# Altium PCB Board1_v1.PcbDoc
Units mm, origin at the board's own origin, x right, y up, seen from the top; angles counter-clockwise.
Board outline 100 x 70 mm, 2 copper layers (Top Layer, Bottom Layer); 24 components, 34 nets, 137 pads, 108 vias.
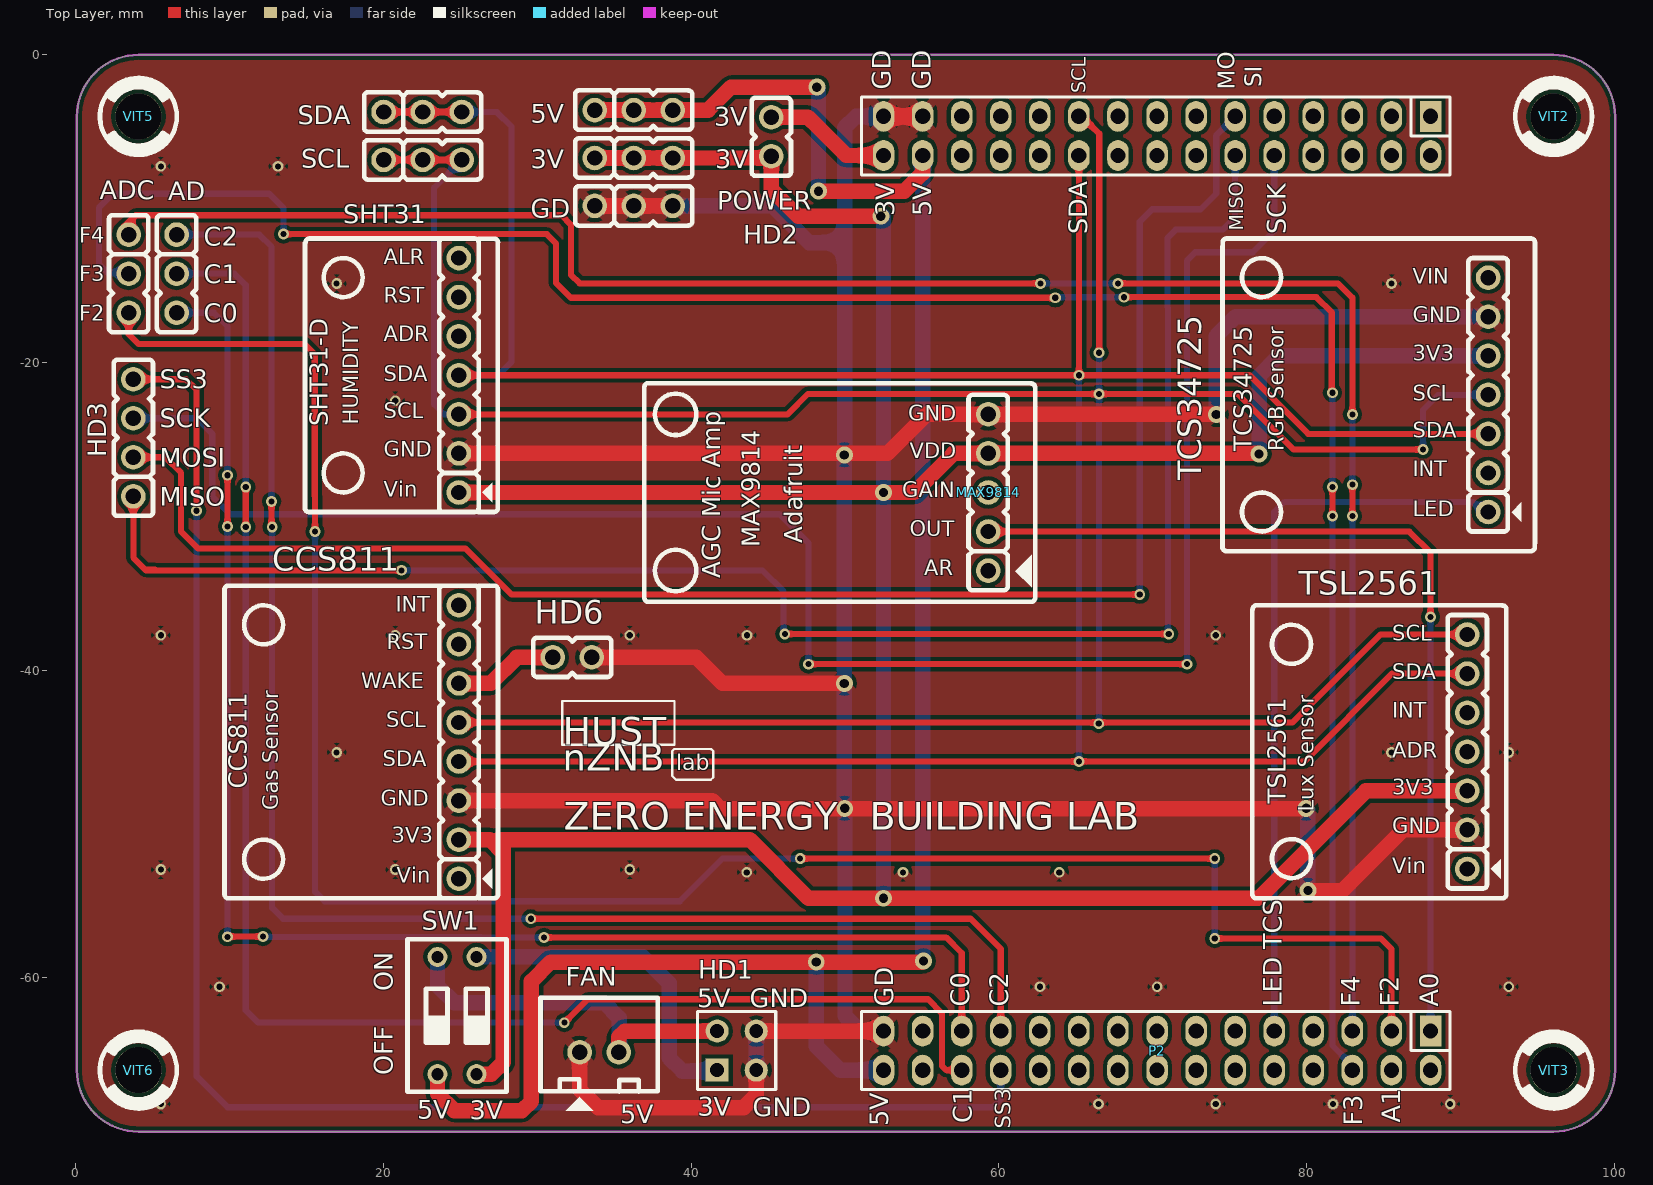
[diagram p0: Top Layer view]
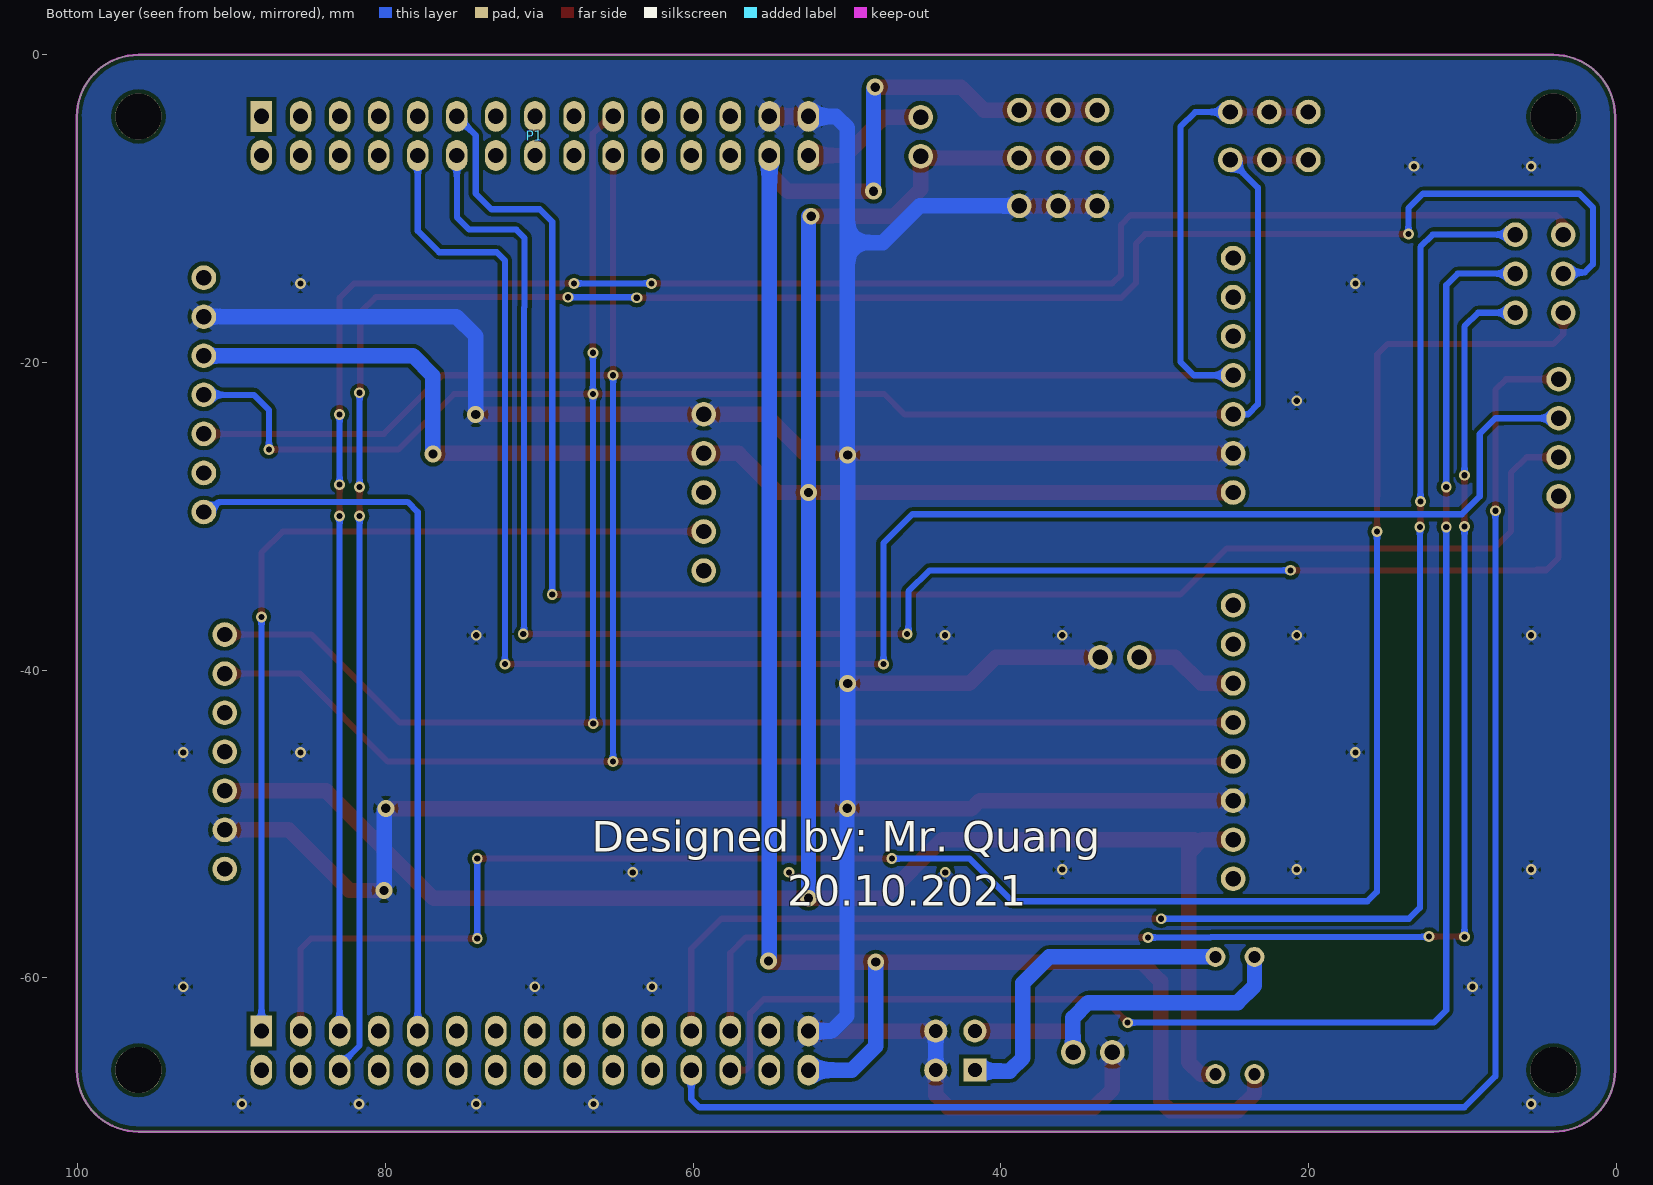
[diagram p1: Bottom Layer view, seen from below]

## Layer stack, top to bottom
Top Solder: solder mask 0.0102, Solder Resist, Dk 3.5
Top Layer: signal copper 0.0356
Dielectric 1: dielectric 0.32, FR-4, Dk 4.8
Bottom Layer: signal copper 0.0356
Bottom Solder: solder mask 0.0102, Solder Resist, Dk 3.5

## Board outline
0.064,-66 ccw(c4.064,-66) 4.064,-70 96.064,-70 ccw(c96.064,-66) 100.064,-66 100.064,-4 ccw(c96.064,-4) 96.064,0 4.064,0 ccw(c4.064,-4) 0.064,-4

## Design rules (kind name [scope] priority, off if disabled: settings)
Clearance "Stitching GND" [IsStitchingVia and InNet('GND') vs (IsVia and (Not IsStitchingVia)) Or IsPad] p1: gap=0.127 ignorepadtopadclearanceinfootprint=FALSE
Clearance [All] p2: gap=0.254 ignorepadtopadclearanceinfootprint=FALSE
PlaneConnect [All] p1: planeconnectstyle=Relief reliefexpansion=0.508 reliefentries=4 reliefconductorwidth=0.6 reliefairgap=0.4
PolygonConnect [All] p1: connectstyle=Relief reliefconductorwidth=0.6 reliefentries=4 polygonreliefangle="45 Angle" airgapwidth=0.254
RoutingVias RoutingVias_Power [InNetClass('Power_class')] p1: holewidth=0.6 width=1.1 viastyle="Through Hole" minholewidth=0.6 minwidth=1.1 maxholewidth=0.6 maxwidth=1.1
RoutingVias RoutingVias_Signal [All] p2: holewidth=0.4 width=0.7 viastyle="Through Hole" minholewidth=0.4 minwidth=0.7 maxholewidth=0.4 maxwidth=0.7
SolderMaskExpansion [All] p1: expansion=0.102 istentingtop=FALSE
UnRoutedNet [All] p1: checkbadconnections=TRUE
Width Width_Power [InNetClass('Power_class')] p1: maxlimit=2 minlimit=1 preferedwidth=1
Width Width_Signal [All] p2: maxlimit=0.4 minlimit=0.4 preferedwidth=0.4
28 further rules are at their usual default settings.

## Components (designator, comment, footprint, x,y, rotation, side; value= is the part's Value field where it differs from the comment)
3V "Header 3" Header_3 36.264,-6.702 r0 top (schematic designator HD?)
5V "Header 3" Header_3 36.264,-3.588 r0 top (schematic designator HD?)
AD "Header 3" Header_3 6.544,-14.223 r270 top
ADC "Header 3" Header_3 3.43,-14.223 r270 top
CCS811 "JP8 PIN" CCS811 19.693,-49.963 r0 top value=JP7
FAN "JP2" CON2 34.017,-64.841 r0 top value="Terminal Block 2-pin 5mm Screw"
GD "Header 3" Header_3 36.264,-9.816 r0 top (schematic designator HD?)
HD1 "Jumper 2x2" HDR2X2 41.688,-66.002 r0 top value="JP 2x2"
HD2 "PWR SEL" Header_2 45.206,-5.318 r90 top value="Header 2"
HD3 "SPI" Header_4 3.735,-24.892 r90 top value="Header 4"
HD6 "WAKE" Header_2 32.263,-39.164 r180 top value="Header 2"
MAX9814 "JP5" MAX9814 59.309,-33.528 r0 top
P1 "Header 15X2H" HED15X2H#1 88.064,-4 r180 bottom
P2 "Header 15X2H" HED15X2H#2 88.064,-63.46 r180 top
SCL "Header 3" Header_3 22.543,-6.828 r0 top
SDA "Header 3" Header_3 22.543,-3.714 r0 top
SHT31 "JP7 PIN" SHT31 24.9,-28.448 r0 top value=JP7
SW1 "SW - DIP2" DIP_Switch2 24.776,-62.452 r90 top
TCS34725 "JP7 PIN" TCS34725 74.537,-32.258 r0 top value=JP7
TSL2561 "JP7 PIN" TSL2561 90.456,-52.924 r0 top value=JP7
VIT2 "1" "Screw 3 small" 96.064,-4 r0 top
VIT3 "1" "Screw 3 small" 96.064,-66 r0 top
VIT5 "1" "Screw 3 small" 4.064,-4 r0 top
VIT6 "1" "Screw 3 small" 4.064,-66 r0 top

## Footprints (in the part's own frame and the unit in brackets; to place one, negate y for a bottom-side part, rotate by r counter-clockwise, add the part's x,y. Pads: shape width x height; smd on the part's side, far side on the other; paste and mask are expansions set on the pad)
CCS811 [mm]
  round 1.6 hole 1 mask+0.1: 1(5.207,-3.596) 2(5.207,-1.056) 3(5.207,1.484) 4(5.207,4.024) 5(5.207,6.564) 6(5.207,9.104) 7(5.207,11.644) 8(5.207,14.184)
  silkscreen extent -10.03,-4.87 7.75,15.45, body extent 3.94,-4.87 6.48,15.45, height 10.1
CON2 [mm] "CON2"
  round 1.6 hole 1 mask+0.1: 1(-1.27,0) 2(1.27,0)
  silkscreen extent -3.81,-3.8 3.81,3.56, body extent -3.75,-2.29 3.75,3.41, height 7
DIP_Switch2 [mm] "DIP Switch 4pin, 2.54mm"
  round 1.3 hole 0.8: 1(-3.81,1.27) 2(-3.81,-1.27) 3(3.81,-1.27) 4(3.81,1.27)
  silkscreen extent -4.95,-3.22 4.95,3.22
HDR2X2 [mm] "Connector; Header; 2x2 Position"
  rect 1.5x1.5 hole 0.9: 1(0,0)
  round 1.5 hole 0.9: 2(0,2.54) 3(2.54,0) 4(2.54,2.54)
  silkscreen extent -1.27,-1.27 3.81,3.81, body extent -1.27,-1.27 3.81,3.81, height 7
Header_2 [mm] "Connector DIP, 2Pin_2.54mm"
  round 1.6 hole 1 mask+0.1: 1(-1.27,0) 2(1.27,0)
  silkscreen extent -2.54,-1.28 2.54,1.28, body extent -2.54,-1.27 2.54,1.27, height 10.1
Header_3 [mm] "Connector DIP, 3Pin_2.54mm"
  round 1.6 hole 1 mask+0.1: 1(-2.54,0) 2(0,0) 3(2.54,0)
  silkscreen extent -3.81,-1.28 3.81,1.28, body extent -3.81,-1.27 3.81,1.27, height 10.1
Header_4 [mm] "Connector DIP, 4Pin_2.54mm"
  round 1.6 hole 1 mask+0.1: 1(-3.81,0) 2(-1.27,0) 3(1.27,0) 4(3.81,0)
  silkscreen extent -5.08,-1.28 5.08,1.28, body extent -5.08,-1.27 5.08,1.27, height 10.1
HED15X2H#1 [mm]
  rect 1.4x2 hole 1: 1(0,0)
  oval 1.4x2 hole 1: 2(0,-2.54) 3(2.54,0) 4(2.54,-2.54) 5(5.08,0) 6(5.08,-2.54) 7(7.62,0) 8(7.62,-2.54) 9(10.16,0) 10(10.16,-2.54) 11(12.7,0) 12(12.7,-2.54) 13(15.24,0) 14(15.24,-2.54) 15(17.78,0) 16(17.78,-2.54) 17(20.32,0) 18(20.32,-2.54) 19(22.86,0) 20(22.86,-2.54) 21(25.4,0) 22(25.4,-2.54) 23(27.94,0) 24(27.94,-2.54) 25(30.48,0) 26(30.48,-2.54) 27(33.02,0) 28(33.02,-2.54) 29(35.56,0) 30(35.56,-2.54)
  body extent -1.27,-3.81 36.83,1.27, height 10.1
HED15X2H#2 [mm]
  rect 1.4x2 hole 1: 1(0,0)
  oval 1.4x2 hole 1: 2(0,2.54) 3(2.54,0) 4(2.54,2.54) 5(5.08,0) 6(5.08,2.54) 7(7.62,0) 8(7.62,2.54) 9(10.16,0) 10(10.16,2.54) 11(12.7,0) 12(12.7,2.54) 13(15.24,0) 14(15.24,2.54) 15(17.78,0) 16(17.78,2.54) 17(20.32,0) 18(20.32,2.54) 19(22.86,0) 20(22.86,2.54) 21(25.4,0) 22(25.4,2.54) 23(27.94,0) 24(27.94,2.54) 25(30.48,0) 26(30.48,2.54) 27(33.02,0) 28(33.02,2.54) 29(35.56,0) 30(35.56,2.54)
  silkscreen extent -1.27,-1.27 37,3.81, body extent -1.27,-1.27 36.83,3.81, height 10.1
MAX9814 [mm] "JP5"
  round 1.6 hole 1 mask+0.1: 1(0,0) 2(0,2.54) 3(0,5.08) 4(0,7.62) 5(0,10.16)
  silkscreen extent -22.35,-2.03 3.05,12.19, body extent -1.27,-1.27 1.27,11.43, height 10.1
"Screw 3 small" [mm] "Hole 3mm, outline 5mm"
  round 3 hole 3 mask+0.1: 1(0,0)
  silkscreen extent -2.5,-2.5 2.5,2.5, body extent -2.5,-2.5 2.5,2.5, height 1.73
SHT31 [mm] "JP7"
  round 1.6 hole 1 mask+0.1: 1(0,0) 2(0,2.54) 3(0,5.08) 4(0,7.62) 5(0,10.16) 6(0,12.7) 7(0,15.24)
  silkscreen extent -10.01,-1.27 2.54,16.51, body extent -1.27,-1.27 1.27,16.51, height 10.1
TCS34725 [mm] "JP8"
  round 1.6 hole 1 mask+0.1: 1(17.272,2.54) 2(17.272,5.08) 3(17.272,7.62) 4(17.272,10.16) 5(17.272,12.7) 6(17.272,15.24) 7(17.272,17.78)
  silkscreen extent 0,0 20.32,20.32, body extent 16,1.27 18.54,19.05, height 10.1
TSL2561 [mm]
  round 1.6 hole 1 mask+0.1: 1(0,0) 2(0,2.54) 3(0,5.08) 4(0,7.62) 5(0,10.16) 6(0,12.7) 7(0,15.24)
  silkscreen extent -13.97,-1.91 2.54,17.14, body extent -1.27,-1.27 1.27,16.51, height 10.1

## Part data
3V 5V AD ADC GD SCL SDA: library part Header3
CCS811: library part JP8
FAN: library part "Terminal 2", "Terminal 2pin 5mm", Color=Blue, Current - IEC=-, Manufacturer="On Shore Technology Inc.", Manufacturer Part Number=OSTTH020160, Material Flammability Rating="UL94 V-0", Operating Temperature="-40°C ~ 115°C", Supplier Part Number 1=ED2655-ND, Voltage - UL=300V, BuyLink=http://www.tme.vn/Product.aspx?id=857#page=pro_info, Category="Connectors, Interconnects", ComponentLink1Description=http://www.on-shore.com/wp-content/uploads/2015/09/ostthxx0160.pdf, ComponentLink1URL=http://www.on-shore.com/wp-content/uploads/2015/09/ostthxx0160.pdf, Contact Material=Brass, Contact Mating Finish=Nickel, Contact Tail Length=-, Cost (VN)=1500, Current - UL=-, Features="Interlocking (Side)", Header Orientation=-, Housing Material=Brass, Ingress Protection=-, Insulation Height=-, Mounting Type=Screw, Number of Levels=2, Number of Positions=2, Packaging=Bulk, Part Status=Active, Pitch="0.197\" (5.00mm)", Plug Wire Entry=-, Positions Per Level=2, Pricing 1="1=0.58, 10=0.546, 50=0.4368, 100=0.4186, 250=0.3822, 500=0.364, 1000=0.3003, 2500=0.273, 5000=0.2639 (USD)", RoHS="RoHS Compliant", Screw Size=-, Stock 1=43547, Supplier 1=Digi-Key, Termination Style=Screw, Torque - Screw="0.4 Nm (3.5 Lb-In)", Type="Plug for Unshrouded Header", Voltage - IEC=-, Wire Gauge or Range - AWG="14-22 AWG", Wire Gauge or Range - mm²=0.34-1.5mm², Wire Strip Length=5-6mm
HD1: library part JP2x2
HD2 HD6: library part Header2, "Header 2"
HD3: library part Header4, "Header 4"
P1 P2: "Header, 15-Pin, Dual row, Right Angle", LatestRevisionDate=17-Jul-2002, LatestRevisionNote="Re-released for DXP Platform.", Publisher="Altium Limited"
SHT31 TCS34725 TSL2561: library part JP7
SW1: library part SWDIP-2, "DIP Switch, 2 Position, SPST"
VIT2 VIT3 VIT5 VIT6: library part VIT, "Oc Vit"

## Via types
v1: diameter 0.7, hole 0.4, Top Layer to Bottom Layer, 94 vias
v2: diameter 1.1, hole 0.6, Top Layer to Bottom Layer, 14 vias

## Nets (pads, with @x,y where several pads share a name; then routed paths per layer and width w, separated by ;. In a path a pad name is that pad's centre, name@x,y a point inside that pad or via, vN(x,y) a via of type N, cw(c..) or ccw(c..) an arc to the next point about the centre after c; other vN are vias at no path point)
3.3V: 3V.1 3V.2 3V.3 CCS811.2 HD2.1 MAX9814.4 SHT31.1 SW1.2 TCS34725.5 TSL2561.3 | length 226.9
  Top Layer w1: CCS811.2 26.911,-51.019 27.782,-51.89 ; SHT31.1 v2(52.504,-28.448) 54.502,-28.448 57.042,-25.908 MAX9814.4 76.884,-25.908 v2(76.921,-25.946) ; SW1.2 27.01,-66.262 27.782,-65.49 27.782,-51.89 ; 3V.1@33.641,-6.702 36.181,-6.702 38.721,-6.702 45.092,-6.702 HD2.1 45.206,-8.737 46.957,-10.489 v2(52.329,-10.489) ; TSL2561.3 83.855,-47.844 76.87,-54.829 v2(52.504,-54.829) 47.627,-54.829 43.817,-51.019 27.44,-51.019 27.782,-51.361 27.782,-51.89
  Bottom Layer w1: v2(52.504,-54.829) v2(52.504,-28.448) v2@52.504,-10.489 ; v2(76.921,-25.946) 76.921,-20.864 78.227,-19.558 TCS34725.5
5V: 5V.1 5V.2 5V.3 P1.28 P2.30 SW1.1 | length 135.3
  Top Layer w1: SW1.1 23.506,-67.539 24.605,-68.638 29.004,-68.638 29.612,-68.03 29.612,-60.228 30.865,-58.975 v2(48.131,-58.975) 55.025,-58.975 v2(55.099,-58.902) ; 5V.1@33.516,-3.588 5V.1 5V.2 5V.3 41.101,-3.588 42.591,-2.098 v2(48.17,-2.098) ; v2(48.277,-8.86) 53.87,-8.86 55.044,-7.686 P1.28
  Bottom Layer w1: v2(48.131,-58.975) 48.121,-58.985 48.121,-64.441 49.68,-66 P2.30 ; v2(48.17,-2.098) 48.277,-2.206 v2(48.277,-8.86) ; v2@55.044,-58.902 P1.28
\W\A\K\E\: CCS811.6 HD6.2 | length 6.8
  Top Layer w1: CCS811.6 26.967,-40.859 28.662,-39.164 HD6.2
ADC0: MAX9814.2 P2.1 | length 60.4
  Top Layer w0.4: MAX9814.2 86.692,-30.988 88.064,-32.36 v1(88.064,-36.54)
  Bottom Layer w0.4: P2.1 v1(88.064,-36.54)
ADDR1: SHT31.5
Addr2: TSL2561.4
ALERT: SHT31.7
AR: MAX9814.1
GAIN: MAX9814.3
GND: CCS811.3 FAN.1 GD.1 GD.2 GD.3 HD1.3 HD1.4 HD6.1 MAX9814.5 P1.27 P1.29 P2.29 SHT31.2 TCS34725.6 TSL2561.2 | length 273.9
  Top Layer w1: CCS811.3 41.374,-48.479 41.905,-49.01 79.948,-49.01 v2(79.978,-48.98) ; SHT31.2 52.758,-25.908 55.298,-23.368 MAX9814.5 74.131,-23.368 v2(74.139,-23.376) ; FAN.1 32.747,-67.246 33.942,-68.442 43.411,-68.442 44.228,-67.624 HD1.3 ; HD6.1 40.34,-39.164 42.035,-40.859 v2(49.957,-40.859) ; GD.1 GD.2 GD.3 ; HD1.4 P2.29 P2.29 ; P1.29 P1.27 ; v2(80.091,-54.321) 82.353,-54.321 86.29,-50.384 TSL2561.2
  Bottom Layer w1: GD.3 45.274,-9.816 47.659,-12.201 49.982,-12.201 ; HD1.3 HD1.4 ; P2.29 50.985,-63.46 49.996,-62.472 49.996,-48.995 v2(49.982,-48.98) 49.957,-48.98 v2(49.957,-40.859) v2(49.957,-26.004) 49.982,-25.979 49.982,-12.201 ; P1.29 50.717,-4 49.982,-4.734 49.982,-12.201 ; v2(74.139,-23.376) 74.139,-19.513 74.131,-19.504 74.131,-18.288 75.401,-17.018 TCS34725.6 ; v2(79.978,-48.98) 80.091,-49.093 v2(80.091,-54.321)
  other v1: 5.521,-68.205 5.521,-68.205 66.481,-68.205 66.481,-68.205 74.101,-68.205 74.101,-68.205 81.721,-68.205 81.721,-68.205 89.341,-68.205 89.341,-68.205 9.331,-60.585 9.331,-60.585 62.671,-60.585 62.671,-60.585 70.291,-60.585 70.291,-60.585 93.151,-60.585 93.151,-60.585 43.609,-53.144 53.769,-53.144 63.929,-53.144 5.521,-52.965 5.521,-52.965 20.761,-52.965 20.761,-52.965 36.001,-52.965 36.001,-52.965 16.951,-45.345 16.951,-45.345 85.531,-45.345 85.531,-45.345 93.151,-45.345 93.151,-45.345 5.521,-37.725 5.521,-37.725 20.761,-37.725 20.761,-37.725 36.001,-37.725 36.001,-37.725 43.621,-37.725 43.621,-37.725 74.101,-37.725 74.101,-37.725 20.761,-22.485 20.761,-22.485 16.951,-14.865 16.951,-14.865 85.531,-14.865 85.531,-14.865 5.521,-7.245 5.521,-7.245 13.141,-7.245 13.141,-7.245
Int2: TSL2561.5
INT3: CCS811.8
INT-TCS: TCS34725.2
LED-TCS: P2.9 TCS34725.1 | length 48.2
  Bottom Layer w0.4: P2.9 77.904,-29.718 78.563,-29.059 90.825,-29.059 91.484,-29.718 TCS34725.1
MISO: HD3.1 P1.12 | length 110.3
  Top Layer w0.4: HD3.1 3.735,-32.679 4.521,-33.465 5.142,-33.465 5.188,-33.51 ; 4.548,-33.492 4.566,-33.51 5.188,-33.51 ; v1(21.164,-33.51) 5.188,-33.51 ; v1(46.088,-37.645) v1(71.044,-37.645)
  Bottom Layer w0.4: v1(21.164,-33.51) 44.633,-33.51 46.004,-34.881 46.004,-37.561 v1(46.088,-37.645) ; v1(71.044,-37.645) 70.988,-37.589 70.988,-16.412 70.957,-16.38 70.957,-11.904 71.502,-11.359 74.56,-11.359 75.364,-10.555 P1.12
MOSI: HD3.2 P1.11 | length 106.8
  Top Layer w0.4: HD3.2 5.825,-26.162 6.841,-27.178 6.841,-30.99 7.93,-32.08 25.32,-32.08 28.32,-35.081 v1(69.164,-35.081)
  Bottom Layer w0.4: v1(69.164,-35.081) 69.164,-10.846 69.977,-10.033 73.112,-10.033 74.131,-9.014 74.131,-5.232 P1.11
NetFAN_2: FAN.2 HD1.2 SW1.4 | length 24.3
  Top Layer w1: FAN.2 35.287,-63.859 35.684,-63.462 HD1.2
  Bottom Layer w1: SW1.4 23.506,-60.517 24.605,-61.615 34.325,-61.615 35.312,-62.602 35.312,-64.815 FAN.2
NetHD1_1: HD1.1 SW1.3 | length 21.6
  Bottom Layer w1: SW1.3 36.868,-58.642 38.561,-60.335 38.561,-65.204 39.424,-66.067 41.623,-66.067 HD1.1
NetHD2_2: HD2.2 P1.30 | length 8.8
  Top Layer w1: HD2.2 47.582,-4.048 ; 47.898,-4.365 47.582,-4.048 ; P1.30 50.081,-6.54 47.59,-4.048 47.582,-4.048
PC0: AD.3 P2.25 | length 96.6
  Top Layer w0.4: v1(9.856,-30.653) v1(9.856,-27.332) ; v1(9.856,-57.336) 9.874,-57.319 v1(12.16,-57.319) ; v1(30.434,-57.375) 56.573,-57.375 57.584,-58.386 P2.25
  Bottom Layer w0.4: AD.3 8.972,-16.763 9.856,-17.647 v1(9.856,-27.332) ; v1(9.856,-57.336) v1(9.856,-30.653) ; v1(12.16,-57.319) 12.177,-57.336 26.331,-57.336 26.37,-57.375 v1(30.434,-57.375)
PC1: AD.2 P2.26 | length 103.4
  Top Layer w0.4: v1(11.042,-30.691) v1(11.042,-28.098) ; v1(31.753,-62.916) 33.279,-61.39 55.399,-61.39 56.297,-62.287 56.297,-65.725 56.573,-66.002 P2.26 P2.26
  Bottom Layer w0.4: AD.2 10.3,-14.223 11.042,-14.965 v1(11.042,-28.098) ; v1(11.042,-30.691) 11.042,-62.108 11.85,-62.916 v1(31.753,-62.916)
PC2: AD.1 P2.23 | length 103.3
  Top Layer w0.4: v1(12.72,-29.031) 12.72,-30.653 v1(12.758,-30.691) ; v1(29.577,-56.159) 58.165,-56.159 60.124,-58.118 P2.23
  Bottom Layer w0.4: AD.1 11.923,-11.683 12.72,-12.479 v1(12.72,-29.031) ; v1(12.758,-30.691) 12.758,-55.444 13.472,-56.159 v1(29.577,-56.159)
PF2: ADC.3 P2.3 | length 131.2
  Top Layer w0.4: ADC.3 3.438,-16.771 3.438,-18.163 4.064,-18.789 14.849,-18.789 15.525,-19.464 15.525,-28.681 15.545,-28.701 v1(15.545,-30.988) ; v1(47.083,-52.251) v1(74.037,-52.251) ; v1(74.033,-57.447) 84.854,-57.447 85.524,-58.118 P2.3
  Bottom Layer w0.4: v1(15.545,-30.988) 15.545,-54.402 16.166,-55.023 39.262,-55.023 42.035,-52.251 v1(47.083,-52.251) ; v1(74.033,-57.447) 74.037,-57.444 v1(74.037,-52.251)
PF3: ADC.2 P2.6 | length 142
  Top Layer w0.4: v1(13.501,-11.652) 30.013,-11.652 30.016,-11.655 30.605,-11.655 31.208,-12.258 31.208,-14.822 32.18,-15.793 v1(63.65,-15.793) v1(63.688,-15.793) ; v1(68.13,-15.755) 68.137,-15.748 80.65,-15.748 81.639,-16.736 81.639,-21.92 v1(81.684,-21.965) ; v1(81.684,-29.984) v1(81.684,-28.098)
  Bottom Layer w0.4: ADC.2 3.35,-14.143 2.03,-14.143 1.512,-13.625 1.512,-9.92 2.405,-9.027 12.554,-9.027 13.501,-9.975 v1(13.501,-11.652) ; v1(63.688,-15.793) v1(63.65,-15.793) 63.688,-15.755 v1(68.13,-15.755) ; v1(81.684,-29.984) 81.684,-64.4 82.984,-65.7 P2.6 ; v1(81.684,-28.098) v1(81.684,-21.965)
PF4: ADC.1 P2.5 | length 132.3
  Top Layer w0.4: ADC.1 3.43,-10.893 3.894,-10.429 31.571,-10.429 32.18,-11.038 32.18,-14.289 32.747,-14.856 v1(62.713,-14.856) ; v1(67.744,-14.856) 82.047,-14.856 82.984,-15.793 v1(82.984,-23.376) ; v1(82.984,-29.984) v1(82.984,-27.938)
  Bottom Layer w0.4: v1(62.713,-14.856) v1(67.744,-14.856) ; P2.5 v1(82.984,-29.984) ; v1(82.984,-27.938) v1(82.984,-23.376)
R\E\S\E\T\: CCS811.7
RST: SHT31.6
SCK: HD3.3 P1.10 | length 119.7
  Top Layer w0.4: v1(47.627,-39.608) v1(72.241,-39.608)
  Bottom Layer w0.4: HD3.3 7.297,-23.622 7.846,-23.622 8.867,-24.643 8.867,-28.702 10.028,-29.863 45.747,-29.863 47.627,-31.743 v1(47.627,-39.608) ; v1(72.241,-39.608) 72.241,-13.359 72.767,-12.833 76.516,-12.833 77.904,-11.445 P1.10
SCL: CCS811.5 P1.19 SCL.1 SCL.2 SCL.3 SHT31.3 TCS34725.4 TSL2561.7 | length 203.6
  Top Layer w0.4: SCL.1 SCL.2 SCL.3 ; CCS811.5 79.095,-43.399 84.81,-37.684 TSL2561.7 ; SHT31.3 46.267,-23.368 47.59,-22.046 v1(66.52,-22.046) 75.539,-22.046 79.146,-25.652 v1(87.581,-25.652) ; P1.19 65.409,-4 66.529,-5.12 66.529,-19.354 v1(66.52,-19.363)
  Bottom Layer w0.4: SHT31.3 23.921,-23.368 23.28,-22.728 23.28,-8.631 SCL.3 ; v1(66.493,-43.477) 66.52,-43.45 v1(66.52,-22.046) v1(66.52,-19.363) ; v1(87.581,-25.652) 87.581,-23.076 88.557,-22.1 91.807,-22.1 TCS34725.4
SDA: CCS811.4 P1.20 SDA.1 SDA.2 SDA.3 SHT31.4 TCS34725.3 TSL2561.6 | length 203.5
  Top Layer w0.4: SDA.1@20.095,-3.714 22.635,-3.714 SDA.3@25.175,-3.714 ; CCS811.4 v1(65.204,-45.939) 79.844,-45.939 85.558,-40.224 TSL2561.6 ; SHT31.4 v1(65.204,-20.828) ; P1.20 v1(65.204,-20.828) ; TCS34725.3 80.106,-24.638 76.296,-20.828 v1(65.204,-20.828)
  Bottom Layer w0.4: SHT31.4 27.444,-20.828 28.32,-19.952 28.32,-4.673 27.361,-3.714 SDA.3@25.175,-3.714 ; v1(65.204,-45.939) v1(65.204,-20.828)
SS3: HD3.4 P2.24 | length 104.2
  Top Layer w0.4: HD3.4 7.152,-21.082 7.846,-21.776 v1(7.846,-29.637)
  Bottom Layer w0.4: v1(7.846,-29.637) 7.846,-66.403 9.856,-68.413 59.599,-68.413 60.124,-67.888 P2.24
VIN: TCS34725.7
Vin2: TSL2561.1
Vin3: CCS811.1
pads on no net: P1.1 P1.2 P1.3 P1.4 P1.5 P1.6 P1.7 P1.8 P1.9 P1.13 P1.14 P1.15 P1.16 P1.17 P1.18 P1.21 P1.22 P1.23 P1.24 P1.25 P1.26 P2.2 P2.4 P2.7 P2.8 P2.10 P2.11 P2.12 P2.13 P2.14 P2.15 P2.16 P2.17 P2.18 P2.19 P2.20 P2.21 P2.22 P2.27 P2.28 VIT2.1 VIT3.1 VIT5.1 VIT6.1

## Polygon pours and split planes (outlines as drawn)
GND on Bottom Layer "Top Poly" (solid, remove dead copper, pour order 40): 1.304,-1.153 1.636,-0.821 2.642,-0.262 97.795,-0.262 100.064,-2.531 100.064,-67.624 97.688,-70 2.423,-70 0.064,-67.641 0.064,-2.422 1.33,-1.156
GND on Top Layer "Top Poly" (solid, remove dead copper, pour order 38): 1.371,0 97.898,0 100.064,-2.166 100.064,-67.624 97.688,-70 2.298,-70 0.064,-67.766 0.064,-3.469

## Keep-outs
Keep-Out Layer:
  the board outline again, w0.15

## Silkscreen, mask and mechanical layers (free items; w line width, h text height)
Top Overlay:
  lines w0.15: 31.61,-44.842 31.61,-42.002 38.917,-42.002 38.917,-44.842 31.61,-44.842 ; 38.76,-46.87 39.016,-47.126 41.27,-47.126 41.441,-46.955 41.441,-45.271 41.296,-45.125 38.905,-45.125 38.76,-45.271 38.76,-46.87
  text "SI" at 77.077,-2.098 h1.1 r90
  text "GD" at 52.964,-2.263 h1.2 r90
  text "GD" at 55.576,-2.263 h1.2 r90
  text "MO" at 75.33,-2.263 h1.1 r90
  text "SCL" at 65.661,-2.488 h0.9 r90
  text "3V" at 41.512,-4.591 h1.2
  text "3V" at 41.563,-7.355 h1.2
  text "POWER" at 41.688,-10.07 h1.2
  text "3V" at 53.197,-10.476 h1.2 r90
  text "5V" at 55.601,-10.476 h1.2 r90
  text "MISO" at 75.902,-11.446 h0.9 r90
  text "SDA" at 65.761,-11.676 h1.2 r90
  text "SCK" at 78.661,-11.676 h1.2 r90
  text "F4" at 0.23,-12.218 h1
  text "C2" at 8.31,-12.408 h1.2
  text "F3" at 0.23,-14.732 h1
  text "C1" at 8.31,-14.855 h1.2
  text "F2" at 0.23,-17.272 h1
  text "C0" at 8.31,-17.395 h1.2
  text "SS3" at 5.463,-21.68 h1.2
  text "SCK" at 5.463,-24.22 h1.2
  text "MOSI" at 5.463,-26.76 h1.2
  text "MISO" at 5.463,-29.3 h1.2
  text "HUST" at 31.666,-44.842 h1.8
  text "lab" at 39.016,-46.87 h1.8
  text "nZNB" at 31.666,-47.123 h3
  text "ZERO ENERGY" at 31.724,-50.373 h1.8
  text "BUILDING LAB" at 51.606,-50.373 h1.8
  text "ON" at 20.607,-60.879 h1.2 r90
  text "GD" at 53.136,-61.874 h1.2 r90
  text "C0" at 58.071,-61.874 h1.2 r90
  text "C2" at 60.611,-61.874 h1.2 r90
  text "LED TCS" at 78.391,-61.874 h1.2 r90
  text "F4" at 83.471,-61.874 h1.2 r90
  text "F2" at 86.011,-61.874 h1.2 r90
  text "A0" at 88.551,-61.874 h1.2 r90
  text "OFF" at 20.607,-66.329 h1.2 r90
  text "5V" at 22.192,-69.171 h1.2
  text "3V" at 25.598,-69.2 h1.2
  text "A1" at 86.088,-69.414 h1.2 r90
  text "C1" at 58.248,-69.441 h1.2 r90
  text "5V" at 35.397,-69.466 h1.2
  text "F3" at 83.638,-69.63 h1.2 r90
  text "5V" at 52.809,-69.647 h1.2 r90
  text "SS3" at 60.77,-69.821 h1 r90
Bottom Overlay:
  text "Designed by: Mr. Quang" at 66.597,-51.819 h2
  text "20.10.2021" at 53.897,-55.319 h2

## Dimensions
0.064,-66 to 100.064,-66 on Mechanical 10
4.064,0 to -1.227,-70 on Mechanical 10

## Text inside footprints (layer, text, board x,y; h text height)
3V: Top TOP hinh chieu bang "3" at 38.55,-6.956 h1.2; Top TOP hinh chieu bang "1" at 33.47,-6.956 h1.2
5V: Top TOP hinh chieu bang "3" at 38.55,-3.842 h1.2; Top TOP hinh chieu bang "1" at 33.47,-3.842 h1.2
AD: Top TOP hinh chieu bang "3" at 6.29,-16.509 h1.2 r270; Top TOP hinh chieu bang "1" at 6.29,-11.429 h1.2 r270
ADC: Top TOP hinh chieu bang "3" at 3.176,-16.509 h1.2 r270; Top TOP hinh chieu bang "1" at 3.176,-11.429 h1.2 r270
CCS811: Top Overlay "Gas Sensor" at 13.47,-49.114 h1.7 r90; Top Overlay "INT" at 20.804,-36.519 h1.7; Top Overlay "Vin" at 20.854,-54.159 h1.7; Top Overlay "3V3" at 20.531,-51.559 h1.7; Top Overlay "GND" at 19.82,-49.134 h1.7; Top Overlay "SDA" at 19.963,-46.574 h1.7; Top Overlay "SCL" at 20.174,-44.034 h1.7; Top Overlay "WAKE" at 18.55,-41.494 h1.7; Top Overlay "RST" at 20.219,-38.954 h1.7; Top TOP hinh chieu bang "8" at 25.3,-36.069 h1.2 r90; Top TOP hinh chieu bang "1" at 25.3,-53.769 h1.2 r90
FAN: Top TOP hinh chieu bang "1" at 32.617,-65.341 h1; Top TOP hinh chieu bang "2" at 35.017,-65.341 h1
GD: Top TOP hinh chieu bang "3" at 38.55,-10.07 h1.2; Top TOP hinh chieu bang "1" at 33.47,-10.07 h1.2
HD1: Top Overlay "3V" at 40.418,-68.971 h1.2; Top Overlay "5V" at 40.4,-61.908 h1.2; Top Overlay "GND" at 43.817,-61.908 h1.2; Top Overlay "GND" at 43.999,-68.992 h1.2
HD2: Mechanical 1 "HD?" at 45.156,-5.268 h0.8 r90; Mechanical 1 "2" at 45.46,-4.302 h1.2 r90; Mechanical 1 "1" at 45.46,-6.842 h1.2 r90
HD3: Top TOP hinh chieu bang "1" at 3.989,-28.956 h1.2 r90; Top TOP hinh chieu bang "4" at 3.989,-21.336 h1.2 r90
HD6: Mechanical 1 "HD?" at 32.213,-39.214 h0.8 r180; Mechanical 1 "2" at 31.247,-38.91 h1.2 r180; Mechanical 1 "1" at 33.787,-38.91 h1.2 r180
MAX9814: Top Overlay "Adafruit" at 47.625,-31.75 h2 r90; Top Overlay "AGC Mic Amp" at 42.291,-34.036 h2 r90; Top Overlay "VDD" at 54.194,-26.543 h1.7; Top Overlay "GAIN" at 53.721,-29.083 h1.7; Top Overlay "OUT" at 54.219,-31.623 h1.7; Top Overlay "AR" at 55.144,-34.163 h1.7; Top Overlay "GND" at 54.099,-24.108 h1.7; Top TOP hinh chieu bang "5" at 59.563,-23.622 h1.2 r90; Top TOP hinh chieu bang "1" at 59.563,-33.782 h1.2 r90
SCL: Top TOP hinh chieu bang "3" at 24.829,-7.082 h1.2; Top TOP hinh chieu bang "1" at 19.749,-7.082 h1.2
SDA: Top TOP hinh chieu bang "3" at 24.829,-3.968 h1.2; Top TOP hinh chieu bang "1" at 19.749,-3.968 h1.2
SHT31: Top Overlay "ALR" at 20.008,-13.948 h1.7; Top Overlay "RST" at 20.008,-16.448 h1.7; Top Overlay "ADR" at 20.008,-18.948 h1.7; Top Overlay "SDA" at 20.008,-21.548 h1.7; Top Overlay "SCL" at 20.008,-23.948 h1.7; Top Overlay "GND" at 20.008,-26.448 h1.7; Top Overlay "Vin" at 20.008,-29.048 h1.7; Top Overlay "SHT31-D" at 16.77,-24.148 h2 r90; Top Overlay "HUMIDITY" at 18.67,-24.048 h1.7 r90; Mechanical 1 "7" at 25.3,-13.378 h1.2 r90; Mechanical 1 "1" at 25.3,-28.628 h1.2 r90; Mechanical 1 "HD?" at 24.85,-20.778 h0.8 r90
SW1: Mechanical 1 "ON" at 22.49,-60.674 h1.2 r90; Mechanical 1 "OFF" at 22.49,-65.754 h1.2 r90; Mechanical 1 "4" at 23.76,-59.912 h1.2 r90; Mechanical 1 "3" at 26.3,-59.912 h1.2 r90; Mechanical 1 "2" at 26.3,-65.5 h1.2 r90; Mechanical 1 "1" at 24.014,-65.246 h1.2 r90
TCS34725: Top Overlay "RGB Sensor" at 78.837,-25.758 h1.7 r90; Top Overlay "LED" at 86.917,-30.318 h1.7; Top Overlay "INT" at 86.917,-27.718 h1.7; Top Overlay "SDA" at 86.917,-25.218 h1.7; Top Overlay "SCL" at 86.917,-22.818 h1.7; Top Overlay "3V3" at 86.917,-20.218 h1.7; Top Overlay "GND" at 86.917,-17.718 h1.7; Top Overlay "VIN" at 86.917,-15.218 h1.7; Mechanical 1 "HD?" at 91.759,-22.048 h0.8 r90; Mechanical 1 "1" at 92.209,-29.898 h1.2 r90; Mechanical 1 "7" at 92.209,-14.648 h1.2 r90
TSL2561: Top Overlay "SCL" at 85.564,-38.424 h1.7; Top Overlay "SDA" at 85.564,-40.924 h1.7; Top Overlay "INT" at 85.564,-43.424 h1.7; Top Overlay "ADR" at 85.564,-46.024 h1.7; Top Overlay "3V3" at 85.564,-48.424 h1.7; Top Overlay "GND" at 85.564,-50.924 h1.7; Top Overlay "Vin" at 85.564,-53.524 h1.7; Top Overlay "Lux Sensor" at 80.804,-49.201 h1.7 r90; Mechanical 1 "7" at 90.856,-37.854 h1.2 r90; Mechanical 1 "1" at 90.856,-53.104 h1.2 r90; Mechanical 1 "HD?" at 90.406,-45.254 h0.8 r90